# EAGLE board placa_5.0 (EAGLE 7.6.0)
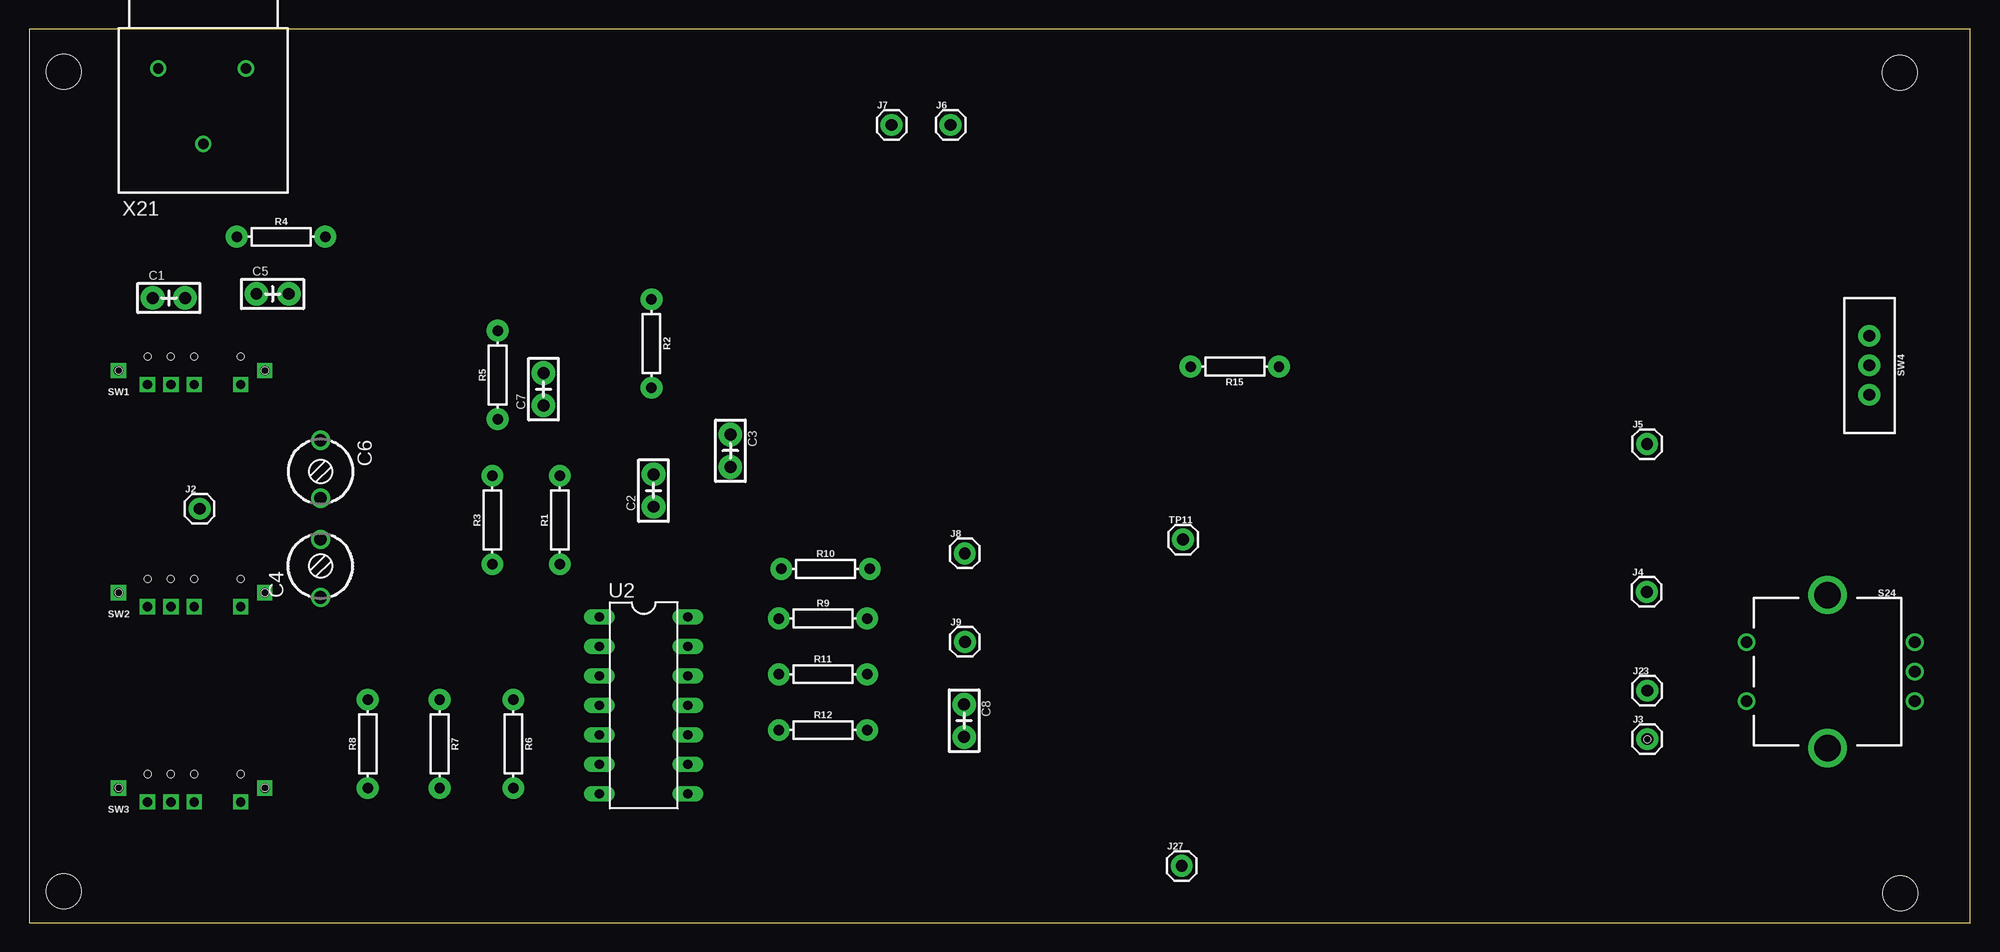
[diagram p0: board, top side]
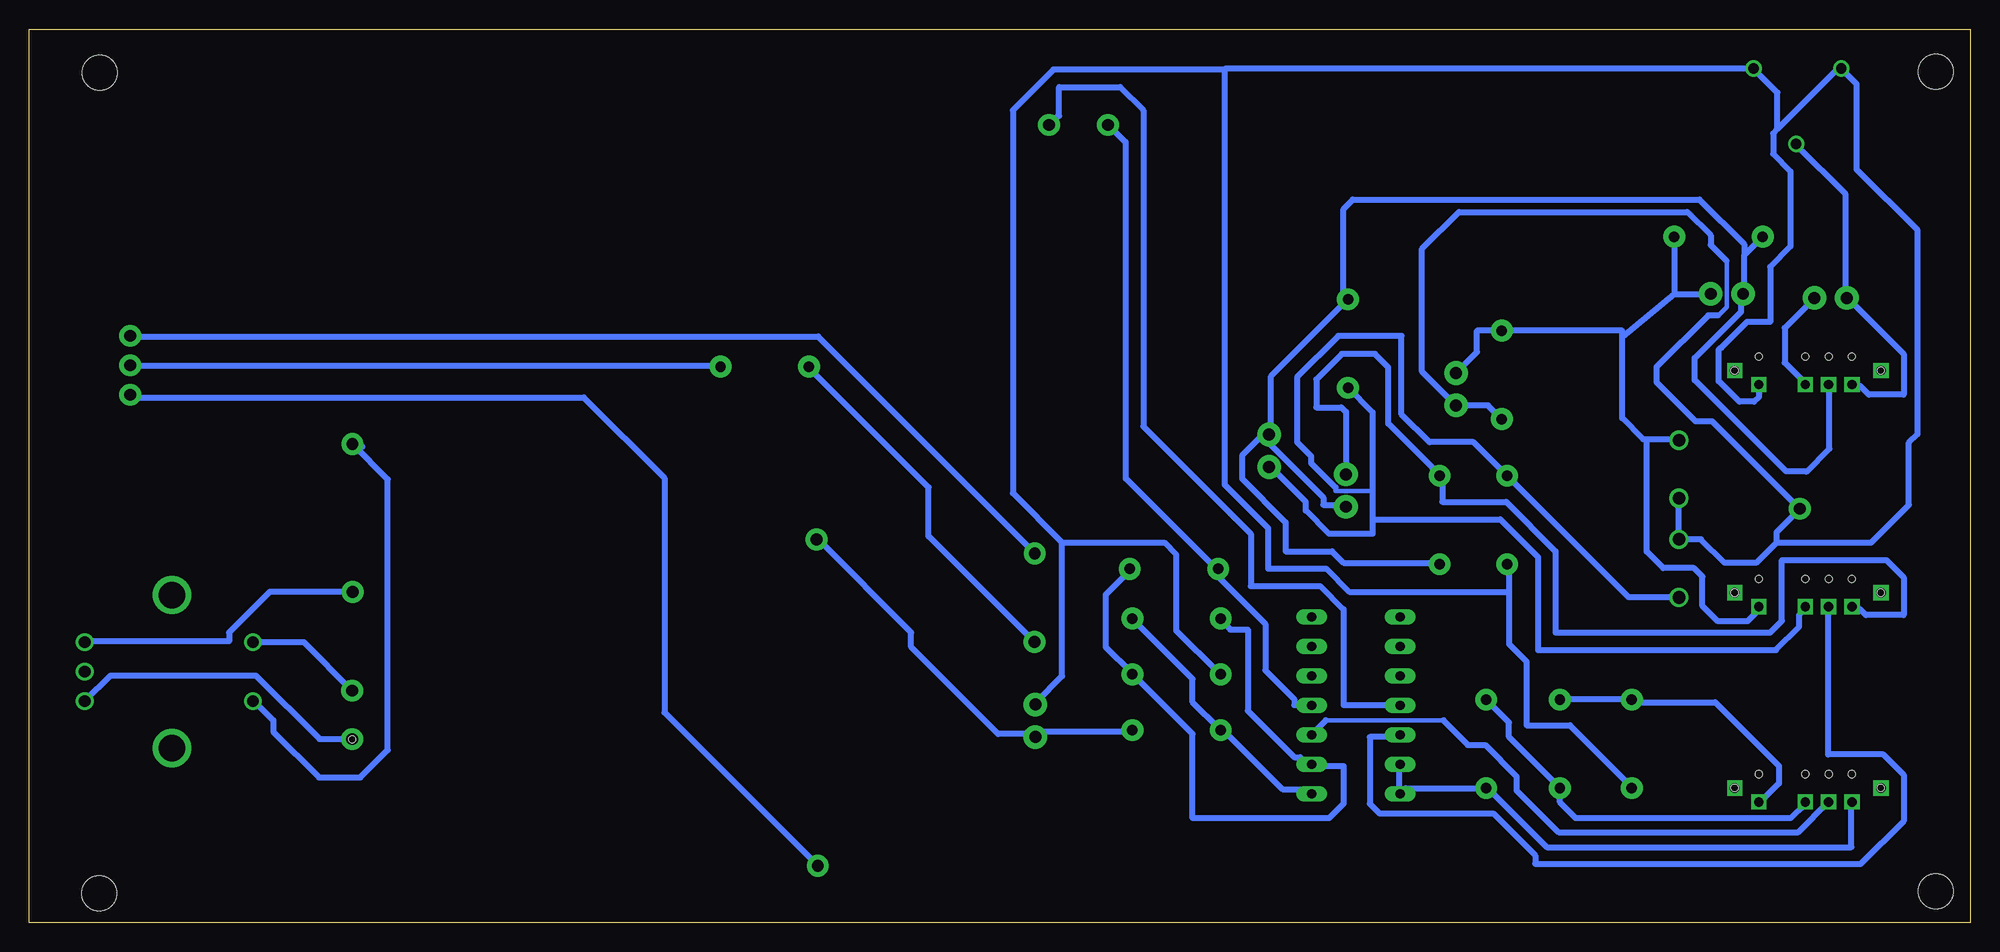
[diagram p1: board, bottom side, seen from below]

Size 167.24 x 77 mm. Coordinates in mm from the lower left corner, seen from the top.
Outline: 0,0 167.24,0 167.24,77 0,77 0,0
Copper layers (1*16): Top 0.035mm / dielectric 1.5mm / Bottom 0.035mm
Design rules "default *": minimum track width 10mil, minimum drill 24mil, track to track 0.8mm, track to pad 1mm, pad to pad 8mil, via to via 8mil, smd to smd 8mil, copper to edge 40mil, drill to drill 8mil, minimum pad ring 10mil, minimum via ring 8mil, stop-mask expansion 4mil, vias tented up to drill 0mil, thermal gap 10mil
Net classes: 0 default: width 0.5 mm, drill 0.8 mm, clearance 0.2 mm
Holes 0.6 mm at 139.4,15.8
Holes 3 mm at 3,2.7 161.2,2.55 3,73.3 161.15,73.25

## Footprints (pad centres in the part's own frame; a part is rotated, then mirrored left to right if it is on the bottom)
CAP-PTH-SMALL-KIT = drill 1.016 pad 2.032: 1 -1.397,0; >NAME 1.397,0
CTRIM3050.504 = drill 1.1: 1 -2.5,0; 2 2.5,0
1X01 = drill 1.016 pad 1.88: 1 0,0
AXIAL-0.3 = drill 0.9 pad 1.88: P$1 -3.81,0; P$2 3.81,0
ROTARY_ENC_PLAIN = drill 1.016: A 7.493,-2.54; B 7.493,2.54; C 7.493,0; SW+ -6.985,2.54; SW- -6.985,-2.54 | drill 2.286: P$3 0,6.604; P$4 0,-6.604
SWITCH_SP3T_SMD = drill 0.8 square: IO1 10.51,-1.2; IO2 6.51,-1.2; IO3 4.51,-1.2; IO4 2.49,-1.2; P$2 -0.01,-0.004; P$3 12.59,-0.004 | hole 0.6: 0,0; 12.6,0; 2.5,1.2; 4.5,1.2; 6.5,1.2; 10.5,1.2
SWITCH_SPDT_PTH_11.6X4.0MM = drill 1.016 pad 1.88: 1 0,2.54; 2 0,0; 3 0,-2.54
DIL14 = drill 0.813 long: 1 -7.62,-3.81; 2 -5.08,-3.81; 3 -2.54,-3.81; 4 0,-3.81; 5 2.54,-3.81; 6 5.08,-3.81; 7 7.62,-3.81; 8 7.62,3.81; 9 5.08,3.81; 10 2.54,3.81; 11 0,3.81; 12 -2.54,3.81; 13 -5.08,3.81; 14 -7.62,3.81
AMP_227161 = drill 0.9 pad 1.27: 1 0,-2.68; 2 -3.88,3.8; 3 3.68,3.8

## Placement (x,y rotation side)
C1  0.1uF  [CAP-PTH-SMALL-KIT]  12.05,53.82 0 top
C2  0.1uF  [CAP-PTH-SMALL-KIT]  53.8,37.23 90 top
C3  0.1uF  [CAP-PTH-SMALL-KIT]  60.42,40.66 270 top
C4  [CTRIM3050.504]  25.11,30.53 90 top
C5  0.1uF  [CAP-PTH-SMALL-KIT]  20.98,54.18 0 top
C6  [CTRIM3050.504]  25.11,39.07 270 top
C7  0.1uF  [CAP-PTH-SMALL-KIT]  44.32,45.96 90 top
C8  0.1uF  [CAP-PTH-SMALL-KIT]  80.55,17.4 270 top
J2  [1X01]  14.7,35.66 0 top
J3  [1X01]  139.4,15.82 0 top
J4  [1X01]  139.36,28.5 0 top
J5  [1X01]  139.38,41.24 0 top
J6  [1X01]  79.38,68.74 0 top
J7  [1X01]  74.3,68.74 0 top
J8  [1X01]  80.6,31.82 0 top
J9  [1X01]  80.62,24.2 0 top
J23  [1X01]  139.4,19.99 0 top
J27  [1X01]  99.29,4.89 0 top
R1  1k  [AXIAL-0.3]  45.72,34.69 90 top
R2  1k  [AXIAL-0.3]  53.62,49.9 270 top
R3  1k  [AXIAL-0.3]  39.91,34.69 90 top
R4  1k  [AXIAL-0.3]  21.71,59.1 0 top
R5  1k  [AXIAL-0.3]  40.37,47.2 90 top
R6  1k  [AXIAL-0.3]  41.72,15.4 270 top
R7  1k  [AXIAL-0.3]  35.37,15.4 270 top
R8  1k  [AXIAL-0.3]  29.18,15.4 90 top
R9  1k  [AXIAL-0.3]  68.39,26.21 0 top
R10  1k  [AXIAL-0.3]  68.61,30.48 0 top
R11  1k  [AXIAL-0.3]  68.39,21.4 0 top
R12  1k  [AXIAL-0.3]  68.39,16.59 0 top
R15  1k  [AXIAL-0.3]  103.86,47.91 180 top
S24  ENCODER-SWITCH  [ROTARY_ENC_PLAIN]  154.94,21.63 0 top
SW1  [SWITCH_SP3T_SMD]  7.72,47.57 0 top
SW2  [SWITCH_SP3T_SMD]  7.72,28.43 0 top
SW3  [SWITCH_SP3T_SMD]  7.72,11.6 0 top
SW4  [SWITCH_SPDT_PTH_11.6X4.0MM]  158.53,48.02 180 top
TP11  [1X01]  99.41,33.01 0 top
U2  TL084P  [DIL14]  52.95,18.72 270 top
X21  1-227161-0  [AMP_227161]  15.01,69.79 0 top

## Library data of the parts
C1-C3 C5 C7 C8 = SparkFun-Capacitors; PROD_ID: CAP-08370
C4 C6 = rcl
J2-J9 J23 J27 TP11 = SparkFun-Connectors
R1-R12 R15 = SparkFun-Resistors; PROD_ID: RES-12182
S24 = SparkFun-Switches; SF_SKU: COM-09117
SW1-SW3 = SparkFun-Switches; PROD_ID: SWCH-10805
SW4 = SparkFun-Switches; PROD_ID: SWCH-08261; SF_SKU: COM-00102
U2 = linear
X21 = con-coax; MF: TYCO ELECTRONICS; MPN: 1-227161; OC_FARNELL: unknown; OC_NEWARK: 33B3200

## Nets
AV+: J6.1 U2.4
AV-: J7.1 R10.P$1 U2.11
GND: C4.2 C6.2 C7.1 C8.1 J2.1 R3.P$1 R5.P$1 R8.P$1 R11.P$1 SW1.IO1 X21.2
N$1: C1.1 SW1.IO4 X21.1
N$2: C1.>NAME SW1.IO2
N$3: C2.1 C3.1 C5.1 R1.P$1 R2.P$1 R4.P$1 SW1.IO3
N$4: C3.>NAME C4.1 R2.P$2 R3.P$2 SW2.IO2
N$5: C2.>NAME R1.P$2 SW2.IO4
N$7: C5.>NAME C6.1 C7.>NAME R4.P$2 R5.P$2 SW2.IO1
N$8: SW2.IO3 U2.5
N$9: J9.1 R15.P$2
N$10: R6.P$1 R7.P$2 SW3.IO2
N$11: R7.P$1 R8.P$2 SW3.IO1
N$12: SW3.IO3 U2.10
N$13: R9.P$1 R10.P$2 R11.P$2 U2.9
N$14: R15.P$1 SW4.2
N$15: J8.1 SW4.3
N$16: J27.1 SW4.1
N$17: C8.>NAME R12.P$2 TP11.1
N$18: J3.1 S24.A
N$19: J4.1 S24.B
N$20: J23.1 S24.SW+
N$21: J5.1 S24.SW-
V1: R6.P$2 SW3.IO4 U2.6 U2.7
V2: R9.P$2 R12.P$1 U2.8

## Tracks (layer width: path | path; a pad name or v marks a point on that pad's centre or on a via)
AV+
  Bottom 0.5: U2.4 49.25,18.75 54,18.75 54,27 56,29 62,29 62,33.5 71.25,42.75 71.25,70 73.25,72 78.5,72 78.5,69.5 78.62,69.5 J6.1
AV-
  Bottom 0.5: U2.11 57,18.75 58.25,18.75 58.25,19.25 60.75,21.75 60.75,25.75 64.75,29.75 64.75,30.25 R10.P$1 65,30.5 72.75,38.25 72.75,67.25 72.81,67.25 J7.1
GND
  Bottom 0.4: 21,57.02 21,53.06 21.74,52.32
  Bottom 0.5: 39.75,28.5 39.75,30.75 R3.P$1 | 39.75,28.5 39.75,24 38.25,22.5 38.25,17 34.5,17 29.25,11.75 R8.P$1 | 78.25,32.75 69.45,32.75 68.4,31.7 68.4,25.15 64.75,21.5 R11.P$1 | 78.25,32.75 78.25,21.25 80.5,19 C8.1 | 16.62,68.38 11.25,73.75 X21.2 9.8,72.26 9.8,64.9 4.55,59.65 4.55,42.1 5.3,41.35 5.3,36 8.55,32.75 16.7,32.75 | 16.62,68.38 17,68 17,66.25 15.5,64.75 15.5,58.25 17.25,56.5 17.25,51.75 19.25,51.75 21.46,49.54 21.5,49.54 21.68,49.36 21.68,46.66 19.9,44.88 18.66,44.88 18.23,45.31 SW1.IO1 18.25,46.25 | 78.25,32.75 82.5,37 82.5,70 79,73.5 64.25,73.5 | 39.75,28.5 53.5,28.5 55.5,30.5 60.5,30.5 60.5,34 64.25,37.75 64.25,73.5 | 16.7,32.75 18.45,31 21.18,31 23.21,33.03 C4.2 C6.2 | 16.62,68.38 16.62,71.53 18.7,73.6 64.15,73.6 64.25,73.5 | 16.7,32.75 16.7,33.66 J2.1 22.26,43.22 23.7,43.22 27.04,46.56 27.04,47.88 22.6,52.32 21.74,52.32 | 21,57.02 22.38,58.4 22.38,59.22 24.4,61.24 44.06,61.24 47.24,58.06 47.24,47.48 C7.1 41.56,44.56 40.5,43.5 | 40.25,43.25 40.5,43.5 | 40.5,43.5 R5.P$1
N$1
  Bottom 0.5: SW1.IO4 10,46.25 9.5,46.25 8.75,45.5 5.75,45.5 5.75,49 10.5,53.75 C1.1 10.75,54 10.75,62.75 15,67 X21.1
N$2
  Bottom 0.5: SW1.IO2 14.25,46.5 16,48.25 16,51.25 13.5,53.75 C1.>NAME
N$3
  Bottom 0.406: C3.1 60.42,41.32
  Bottom 0.5: 12.25,46.25 SW1.IO3 12.15,46.29 12.15,40.85 14.15,38.85 14.2,38.9 15.9,38.9 23.75,46.75 23.75,48.65 19.75,52.65 19.75,54 C5.1 19.5,54.25 19.5,57.5 | 19.5,57.5 R4.P$1 | R1.P$1 45.75,31 54,31 55,32 59,32 59,34.5 62.75,38.25 62.75,40.25 61,42 60.5,42 C3.1 60.25,42.25 60.25,47.08 R2.P$1 54,54.09 54,61.5 53.2,62.3 23.35,62.3 19.5,58.45 19.5,57.5 | C2.1 54,36 55.75,36 55.75,36.65 60.42,41.32
N$4
  Bottom 0.406: 51.5,37.2 54.7,37.2 54.7,37.5
  Bottom 0.5: 51.5,34.75 40.5,34.75 37.25,31.5 37.25,23.5 16.75,23.5 14.75,25.5 14.75,26.5 14.25,27 SW2.IO2 | 51.5,34.75 51.5,37.2 51.5,43.97 R2.P$2 | 51.5,34.75 51.5,33.5 55.25,33.5 57.25,35.5 57.25,36.25 60.25,39.25 C3.>NAME | 54.7,37.5 56.8,39.6 56.8,40.2 58,41.4 58,47 54.45,50.55 49,50.55 49,43.8 46.6,41.4 42.81,41.4 R3.P$2 29.44,28.03 C4.1
N$5
  Bottom 0.5: 45.5,38.35 45.5,38.5 R1.P$2 45.5,37.75 | 45.5,37.75 45.5,36.25 40,36.25 35.75,32 35.75,25 17.25,25 16.25,26 16.25,31.25 7.25,31.25 5.75,29.75 5.75,26.5 9,26.5 9.5,27 10,27 SW2.IO4 | 54,38.75 C2.>NAME 53.8,44 54.2,44.4 56.35,44.4 56.35,46.8 54.15,49 51.3,49 50.15,47.85 50.15,43 45.5,38.35 | 45.5,37.75 45.5,38.35
N$7
  Bottom 0.5: 40.5,51 R5.P$2 | R4.P$2 25.5,59 25.5,54.18 | 30,50.45 30,51 40.25,51 R5.P$2 | R5.P$2 40.75,51 42.5,51 42.5,49.18 C7.>NAME | 25.5,54.18 C5.>NAME | 25.5,54.18 30,50.45 | SW2.IO1 18.23,26.95 19.22,25.96 21.76,25.96 23.08,27.28 23.08,29.82 23.82,30.56 26.46,30.56 27.88,31.98 27.88,41.57 27.98,41.67 | 30,50.45 30,43.46 28.21,41.67 27.98,41.67 | 27.98,41.67 25.21,41.67 C6.1
N$8
  Bottom 0.5: SW2.IO3 12.25,27 12.25,14.5 7.5,14.5 5.75,12.75 5.75,8.75 9.45,5.05 37.45,5.05 37.5,5.1 37.5,5.8 41.1,9.4 50.9,9.4 51.75,10.25 51.75,16 49.25,16 U2.5
N$9
  Bottom 0.5: R15.P$2 100,47.75 89.75,37.5 89.75,33.25 89.67,33.25 J9.1
N$10
  Bottom 0.5: SW3.IO2 14.25,10.25 15.5,9 34,9 35.37,10.37 R7.P$2 | 35.25,11.5 R7.P$2 | R6.P$1 41.5,19 39.75,17.25 39.75,16 35.5,11.75 R7.P$2
N$11
  Bottom 0.5: SW3.IO1 18,10.5 16.5,12 16.5,13.5 22,19 29,19 R8.P$2 29.25,19.25 35.25,19.25 R7.P$1
N$12
  Bottom 0.406: 55.54,17.45 45.4,17.45
  Bottom 0.5: U2.10 55.54,17.45 | 45.4,17.45 43.3,15.3 41.8,15.3 39.1,12.6 39.1,11.4 35.5,7.8 14.83,7.8 SW3.IO3
N$13
  Bottom 0.5: R10.P$2 72.5,30.25 74.5,28.25 74.5,23.75 72.25,21.5 R11.P$2 72,21.25 67,16.25 67,9 55.25,9 54,10.25 54,13.5 56.75,13.5 U2.9 | 57,13.75 U2.9 | U2.9 57.25,13.75 57.75,14.25 58.25,14.25 62.25,18.25 62.25,25.25 63.75,25.25 64.5,26 R9.P$1
N$14
  Bottom 0.5: R15.P$1 107.75,48 158.5,48 SW4.2
N$15
  Bottom 0.5: SW4.3 158.5,50.5 99.25,50.5 99.25,50.47 J8.1
N$16
  Bottom 0.5: 99.5,5 J27.1 112.5,18.1 112.5,38.3 119.45,45.25 158.5,45.25 SW4.1
N$17
  Bottom 0.5: R12.P$2 72.25,16.5 80.5,16.5 80.5,16.25 C8.>NAME 80.75,16.25 83.75,16.25 91.25,23.75 91.25,25 99.25,33 TP11.1
N$18
  Bottom 0.5: S24.A 160.22,21.3 147.7,21.3 142.22,15.82 J3.1
N$19
  Bottom 0.5: S24.B 162.25,24.25 150,24.25 150,25 146.5,28.5 139.5,28.5 J4.1
N$20
  Bottom 0.5: S24.SW+ 143.58,24.17 J23.1
N$21
  Bottom 0.5: 139.25,41 139,41 | 139,41 138.5,41 | S24.SW- 147.75,19 146.2,17.45 146.2,16.46 142.26,12.52 138.7,12.52 136.34,14.88 136.34,38.2 J5.1 139,41
V1
  Bottom 0.5: U2.6 49.25,13.5 49.25,11.25 U2.7 48.65,11.59 R6.P$2 41.5,11.5 36.5,6.5 10.25,6.5 10.25,10.25 SW3.IO4
V2
  Bottom 0.5: 64.5,16.5 R12.P$1 | R9.P$2 72,26 67,21 67,19 64.75,16.75 R12.P$1 | U2.8 57,11.25 57.25,11.5 59.25,11.5 64.25,16.5 R12.P$1